# EAGLE board shema (EAGLE 8.3.2)
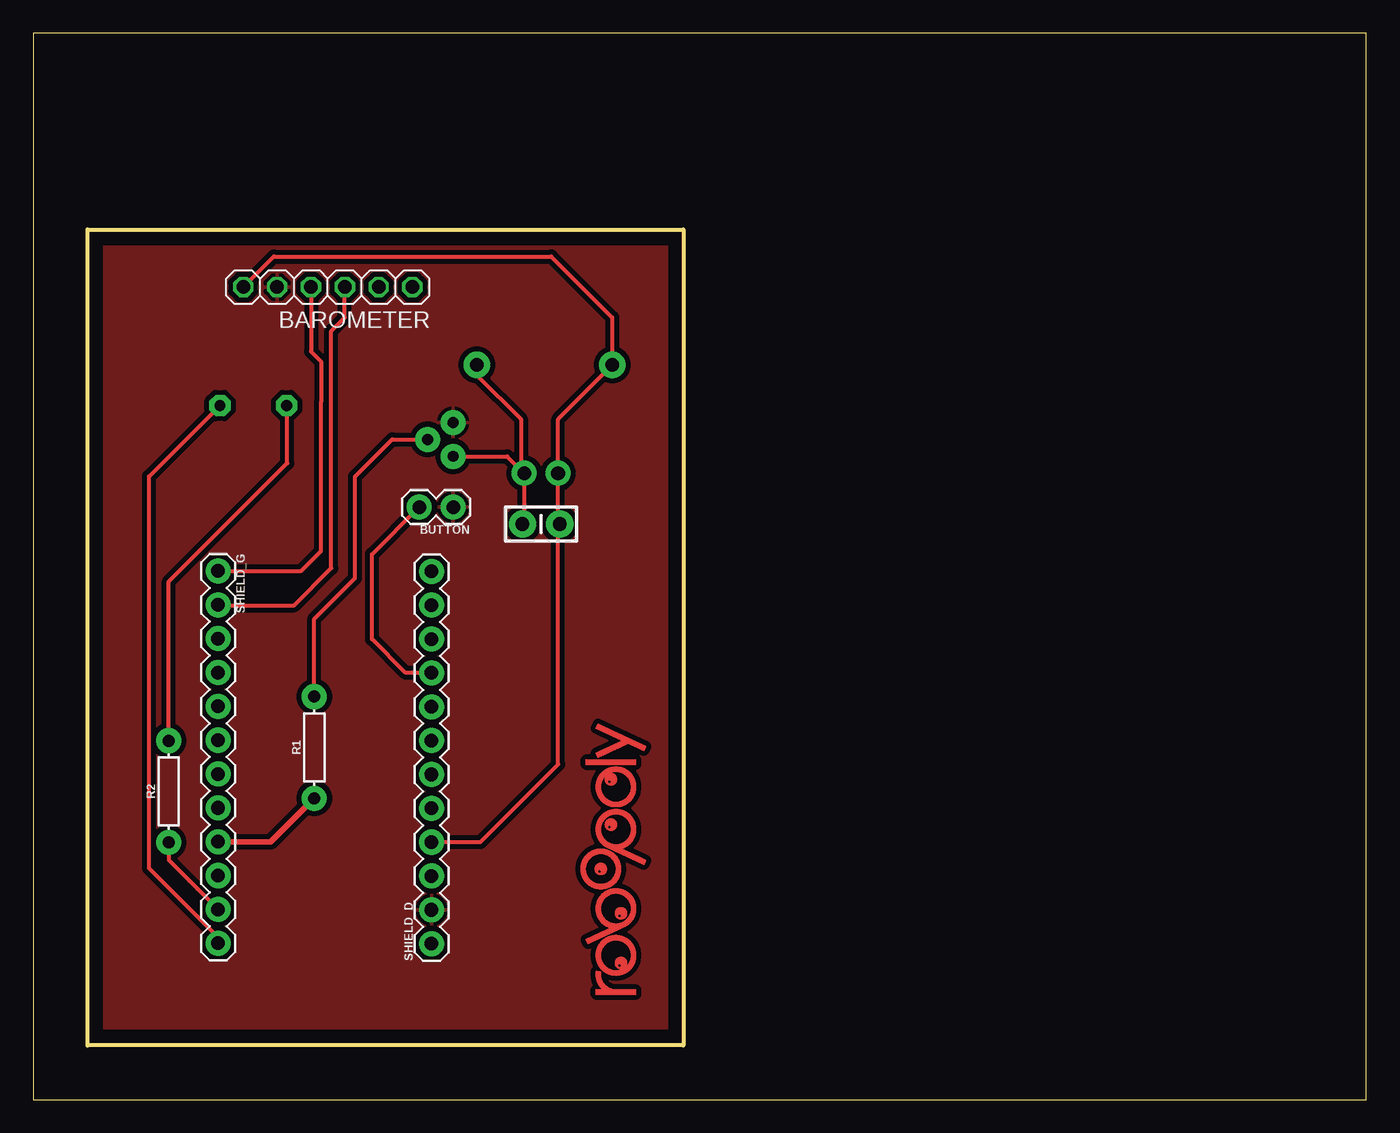
[diagram p0: board, top side]
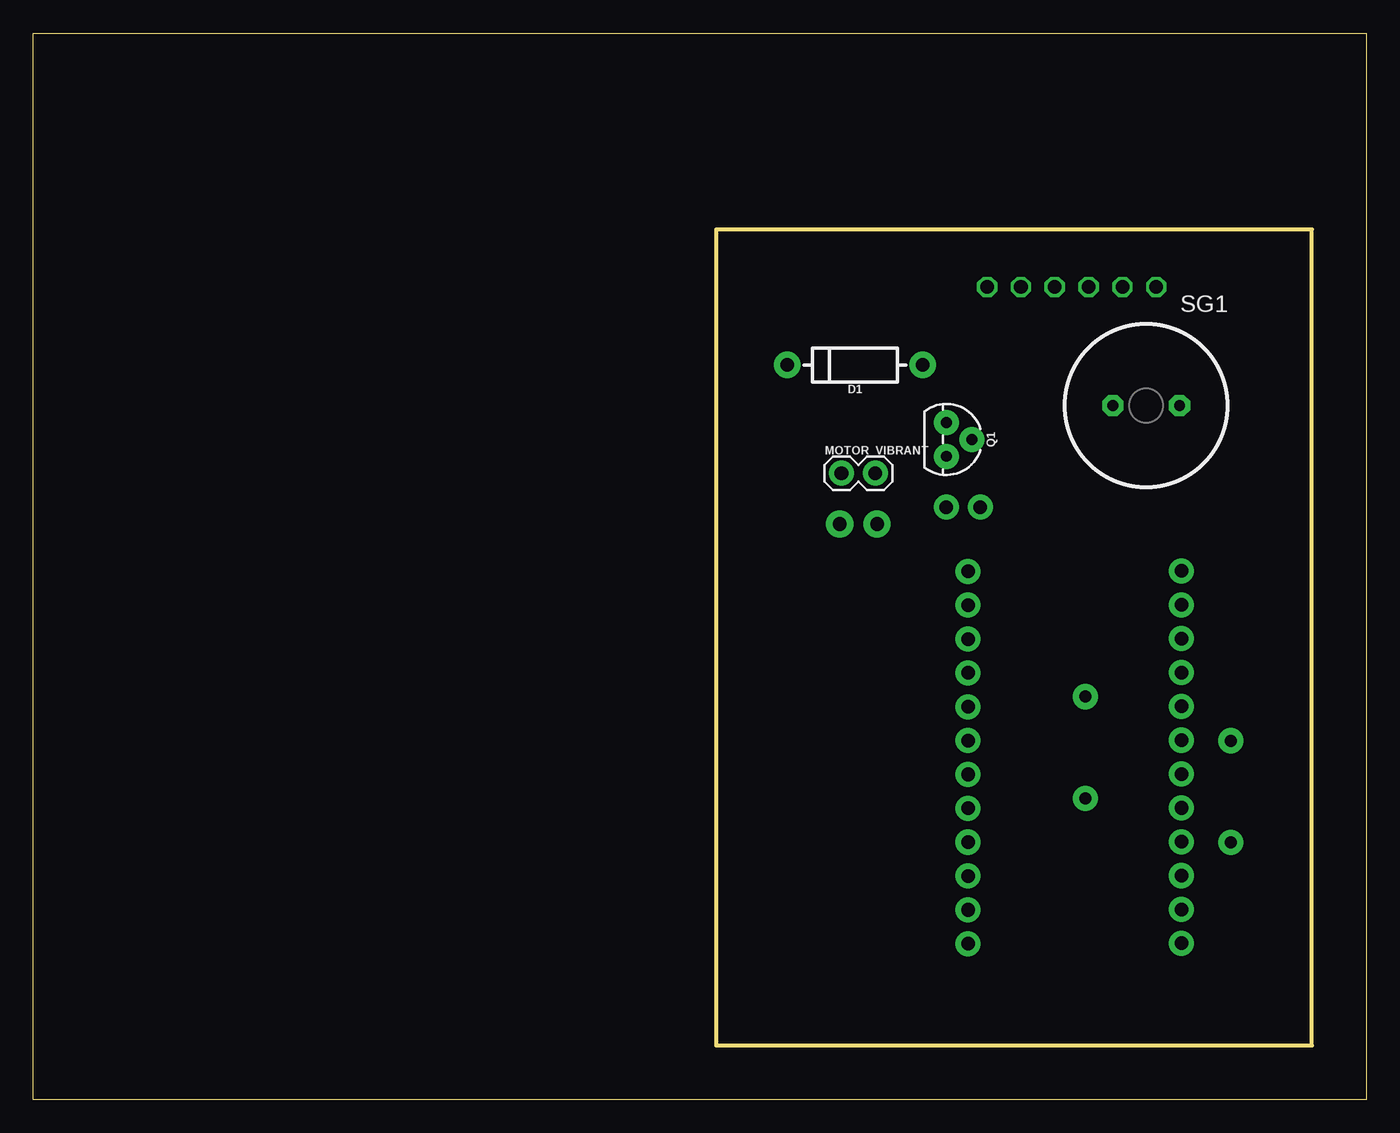
[diagram p1: board, bottom side, seen from below]

Size 100 x 80 mm. Coordinates in mm from the lower left corner, seen from the top.
Outline: 0,0 100,0 100,80 0,80 0,0
Outline: 4.06,65.28 48.77,65.28 48.77,4.06 4.06,4.06 4.06,65.28
Copper layers (1*16): Top 0.035mm / dielectric 1.5mm / Bottom 0.035mm
Design rules "default *": minimum track width 6mil, minimum drill 0.35mm, track to track 15mil, track to pad 15mil, pad to pad 15mil, via to via 15mil, smd to smd 15mil, copper to edge 40mil, drill to drill 6mil, minimum pad ring 10mil, minimum via ring 8mil, stop-mask expansion 4mil, vias tented up to drill 0mil, thermal gap 10mil

## Footprints (pad centres in the part's own frame; a part is rotated, then mirrored left to right if it is on the bottom)
1X06 = drill 1.016 octagon: 1 -6.35,0; 2 -3.81,0; 3 -1.27,0; 4 1.27,0; 5 3.81,0; 6 6.35,0
1X02 = drill 1.016 pad 1.88: 1 0,0; 2 2.54,0
CAP-PTH-SMALL-KIT = drill 1.016 pad 2.032: 1 -1.397,0; 2 1.397,0
DIODE-1N4001 = drill 1 pad 1.981: A -5.08,0; C 5.08,0
TO-92 = drill 0.813 pad 1.88: 1 -1.27,0; 2 0,1.905; 3 1.27,0
AXIAL-0.3 = drill 0.9 pad 1.88: P$1 -3.81,0; P$2 3.81,0
AXIAL-0.3EZ = drill 0.9 pad 1.88: P$1 -3.81,0; P$2 3.81,0
PS1240P02BT = drill 0.8 pad 1.6 octagon: P$1 -2.5,0; P$2 2.5,0
1X12 = drill 1.016 pad 1.88: 1 0,0; 2 2.54,0; 3 5.08,0; 4 7.62,0; 5 10.16,0; 6 12.7,0; 7 15.24,0; 8 17.78,0; 9 20.32,0; 10 22.86,0; 11 25.4,0; 12 27.94,0

## Placement (x,y rotation side)
BAROMETER  [1X06]  22.1,60.96 180 top
BUTTON  [1X02]  31.5,44.45 180 top
C1  0.1uF  [CAP-PTH-SMALL-KIT]  38.1,43.18 180 top
D1  1A/50V/1.1V  [DIODE-1N4001]  38.35,55.12 180 bottom
MOTOR_VIBRANT  [1X02]  39.37,46.99 0 bottom
Q1  200mA/40V  [TO-92]  31.5,49.53 270 bottom
R1  1k  [AXIAL-0.3]  21.08,26.42 90 top
R2  100  [AXIAL-0.3EZ]  10.16,23.11 90 top
SG1  BUZZER  [PS1240P02BT]  16.51,52.07 0 bottom
SHIELD_D  [1X12]  29.87,11.69 90 top
SHIELD_G  [1X12]  13.86,39.66 270 top
U$1  [ROBOPOLY-LOGO-SYMBOL]  43.43,18.03 90 top

## Library data of the parts
BAROMETER = adafruit
BUTTON = SparkFun-Retired
C1 = SparkFun-Capacitors; PROD_ID: CAP-08370
D1 = SparkFun-DiscreteSemi; PROD_ID: DIO-09176
MOTOR_VIBRANT SHIELD_D SHIELD_G = SparkFun-Connectors
Q1 = SparkFun-DiscreteSemi; PROD_ID: TRANS-08447
R1 = SparkFun-Resistors; PROD_ID: RES-08380
R2 = SparkFun-Resistors; PROD_ID: RES-12181
SG1 = robopoly; OC_FARNELL: unknown; OC_NEWARK: unknown
U$1 = robopoly

## Nets
AUDIO0: SG1.P$2 SHIELD_G.12
AUDIO1: R2.P$1 SHIELD_G.11
BUTTON: BUTTON.2 SHIELD_D.9
GND: BAROMETER.5 BUTTON.1 Q1.1 SHIELD_D.2
MOTOR_CONTROL: R1.P$1 SHIELD_G.9
N$2: C1.2 D1.A MOTOR_VIBRANT.2 Q1.3
N$4: R2.P$2 SG1.P$1
SCL: BAROMETER.4 SHIELD_G.1
SDA: BAROMETER.3 SHIELD_G.2
VCC: BAROMETER.6 C1.1 D1.C MOTOR_VIBRANT.1 SHIELD_D.4
ZBRA: Q1.2 R1.P$2

## Tracks (layer width: path | path; a pad name or v marks a point on that pad's centre or on a via)
AUDIO0  (via drill 0.35)
  Top 0.305: SHIELD_G.12 13.86,12.18 8.69,17.36 8.69,46.75 SG1.P$2
  other vias: 14.01,52.07
AUDIO1
  Top 0.305: 12.29,15.84 SHIELD_G.11 | 12.29,15.84 11.68,16.44 | R2.P$1 10.16,17.97 12.29,15.84
BUTTON
  Top 0.305: BUTTON.2 25.4,40.89 25.4,34.54 27.93,32.01 SHIELD_D.9
GND
  pour Top: 1.78,68.83 52.07,68.58 51.05,3.05 2.03,2.79
MOTOR_CONTROL
  Top 0.406: SHIELD_G.9 17.82,19.34 R1.P$1
N$2
  Top 0.2: C1.2 36.83,43.6
  Top 0.305: MOTOR_VIBRANT.2 36.83,43.6 | Q1.3 35.56,48.26 MOTOR_VIBRANT.2 | D1.A 33.27,54.36 36.58,51.05 36.58,47.24 MOTOR_VIBRANT.2
N$4
  Top 0.2: 19.05,52.03 SG1.P$1
  Top 0.305: R2.P$2 10.16,38.86 13.72,42.42 19.05,47.75 19.05,52.03
SCL
  Top 0.305: SHIELD_G.1 20.1,39.66 21.59,41.15 21.59,51.82 21.59,52.32 21.59,55.37 20.83,56.13 BAROMETER.4
SDA
  Top 0.305: SHIELD_G.2 13.9,37.08 19.56,37.08 22.35,39.88 22.35,57.66 23.37,58.67 BAROMETER.3
VCC
  Top 0.2: C1.1 39.37,43.6
  Top 0.305: 39.37,43.6 MOTOR_VIBRANT.1 39.37,51.05 D1.C 43.43,58.67 38.86,63.25 18.03,63.25 BAROMETER.6 | SHIELD_D.4 33.54,19.31 39.37,25.15 39.37,43.05 C1.1
ZBRA
  Top 0.305: R1.P$2 21.08,36.07 24.13,39.12 24.13,46.74 26.92,49.53 Q1.2